# Altium PCB SPT3G_LCBoardRev2.PcbDoc (part 1 of 3)
Units mil, origin at the board's own origin, x right, y up, seen from the top; angles counter-clockwise.
Board outline 7216.28 x 1969 mil, 6 copper layers (Top Layer, Signal Layer 1, Internal Plane 1, Internal Plane 2, Signal Layer 2, Bottom Layer), stack 61.6 mil thick; 29 components, 149 nets, 695 pads, 136 vias.
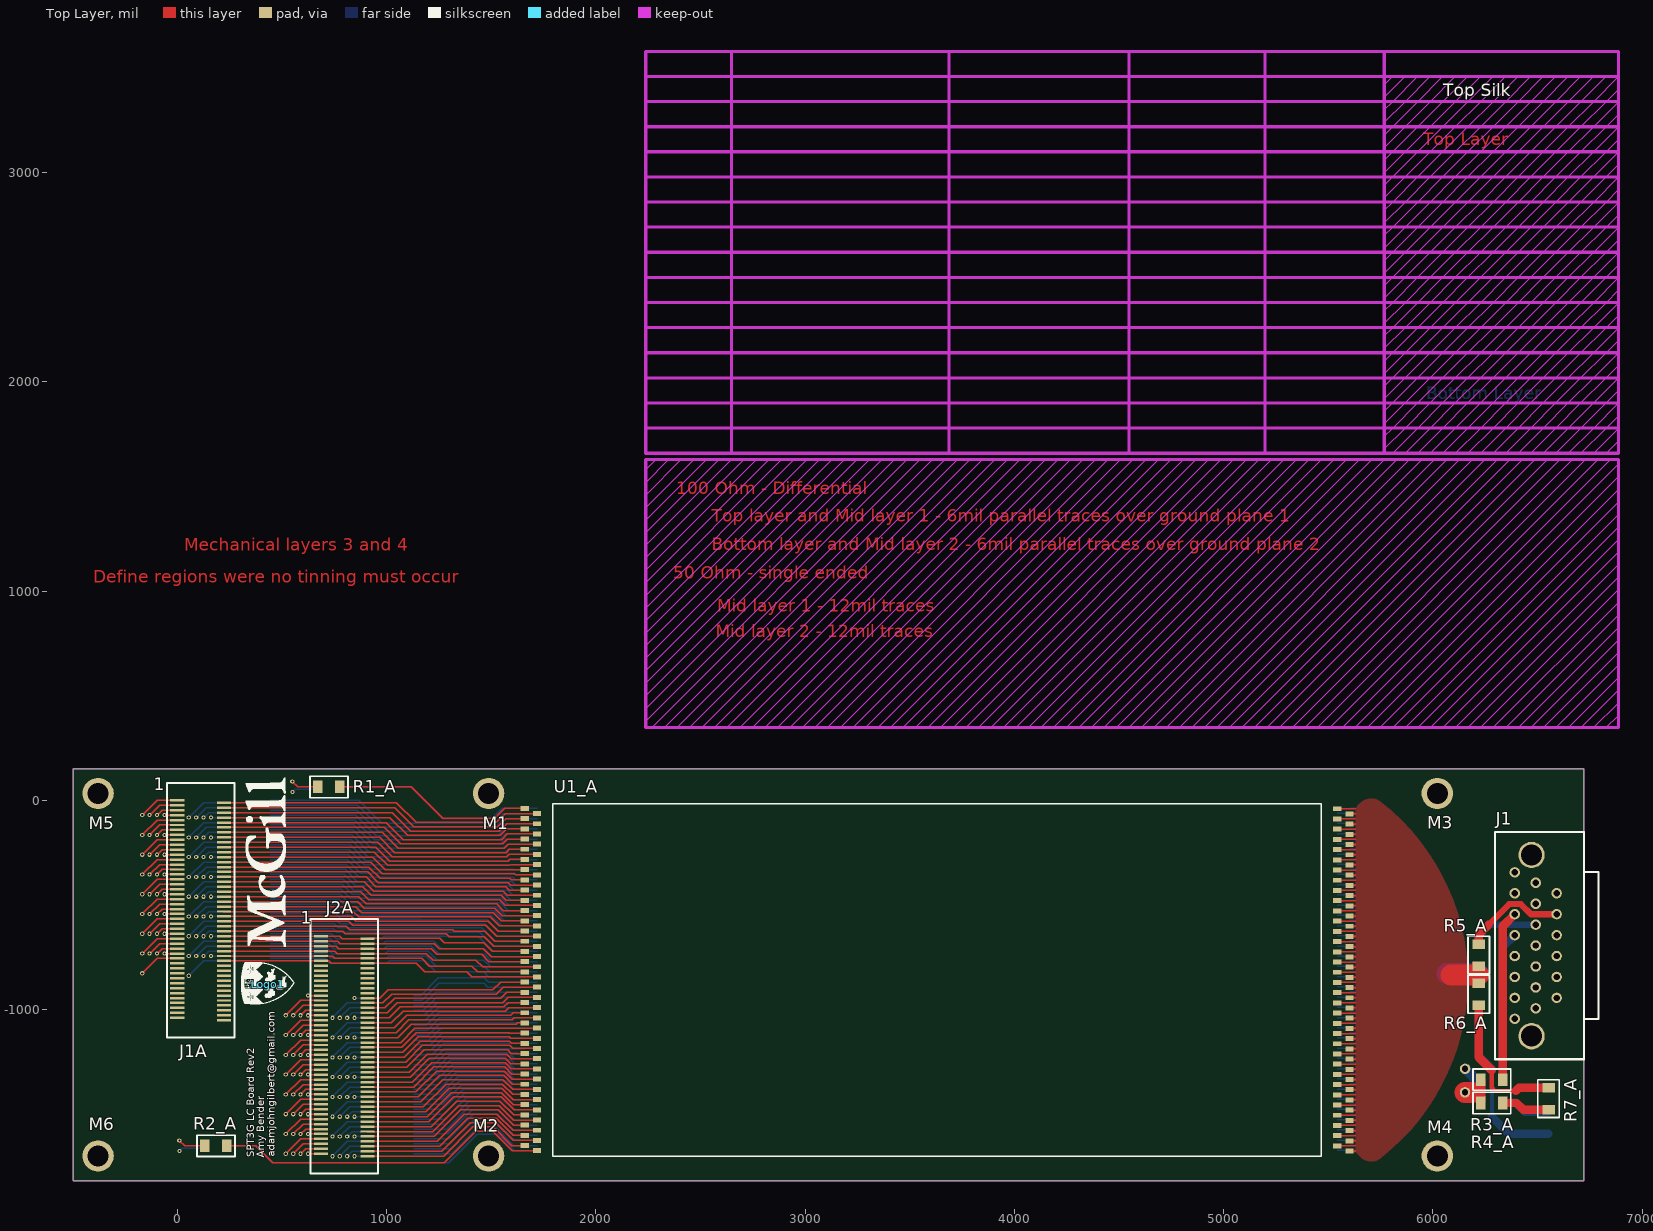
[diagram p0: Top Layer view]
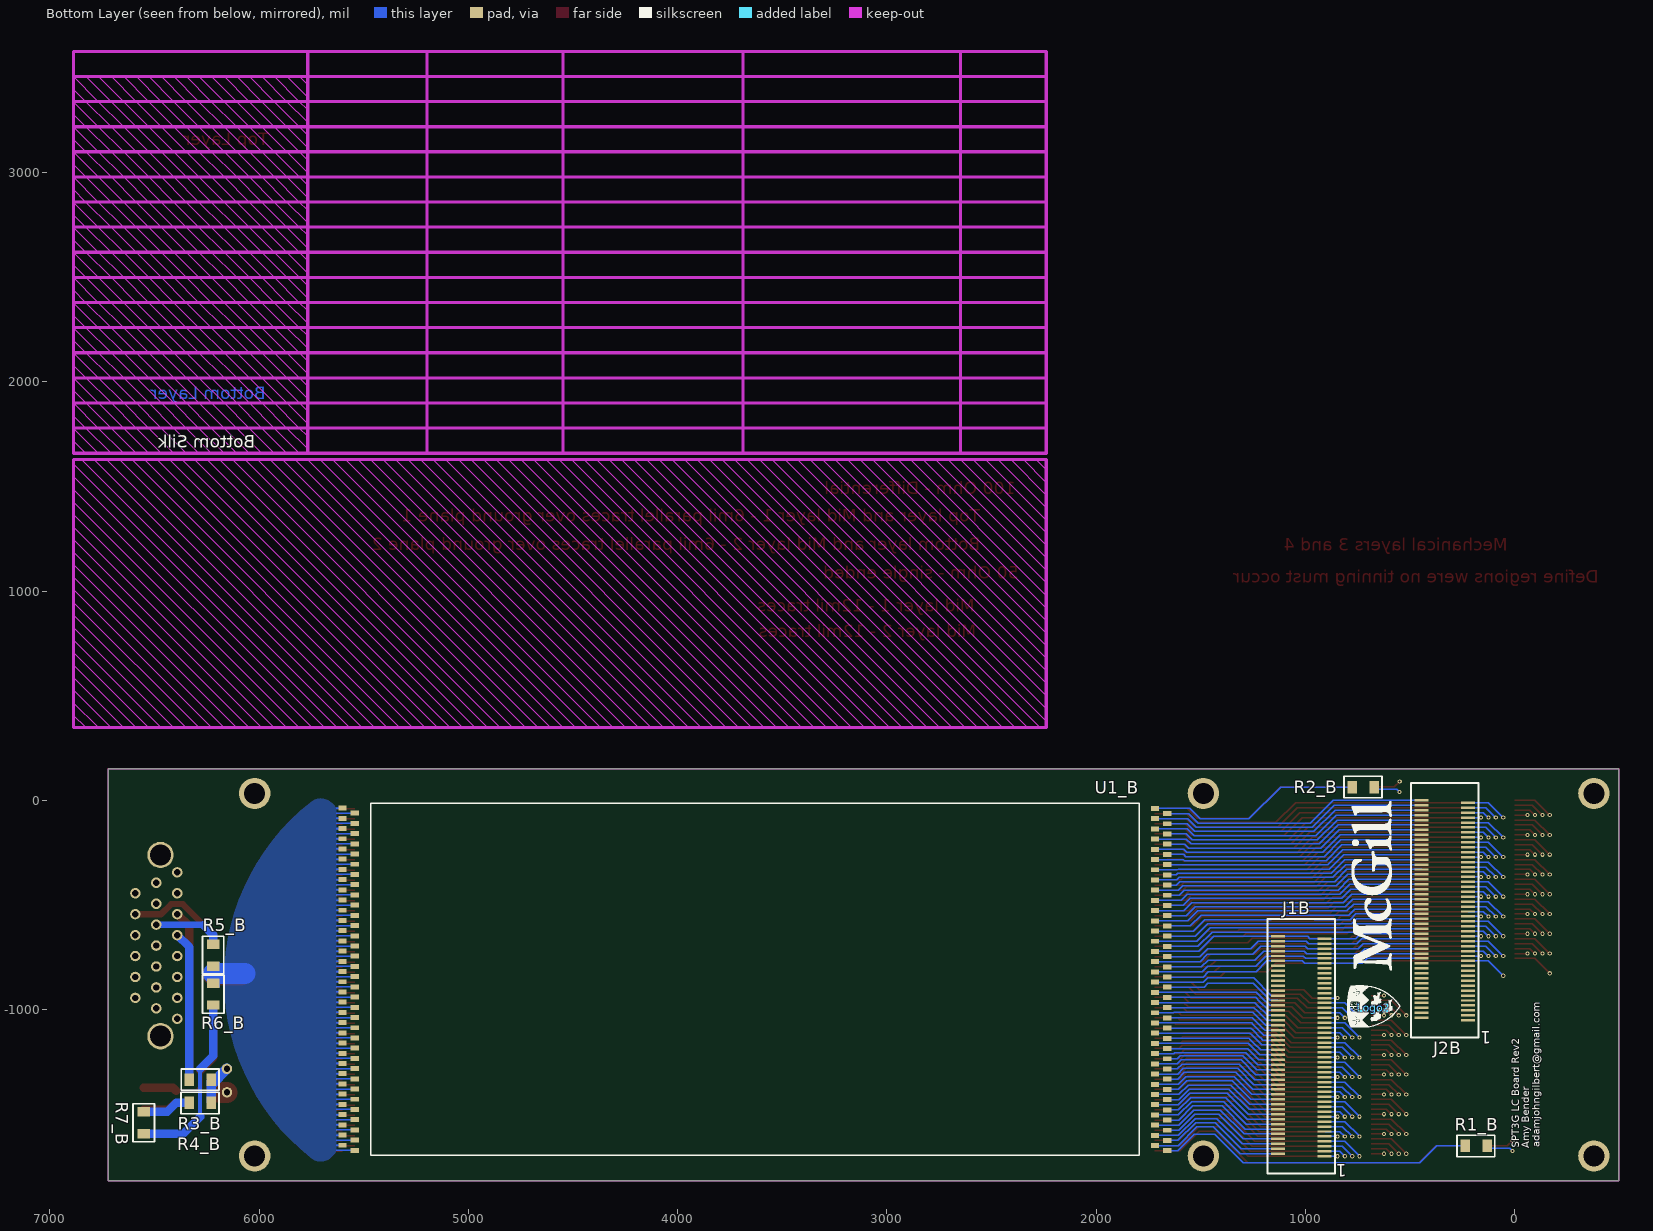
[diagram p1: Bottom Layer view, seen from below]
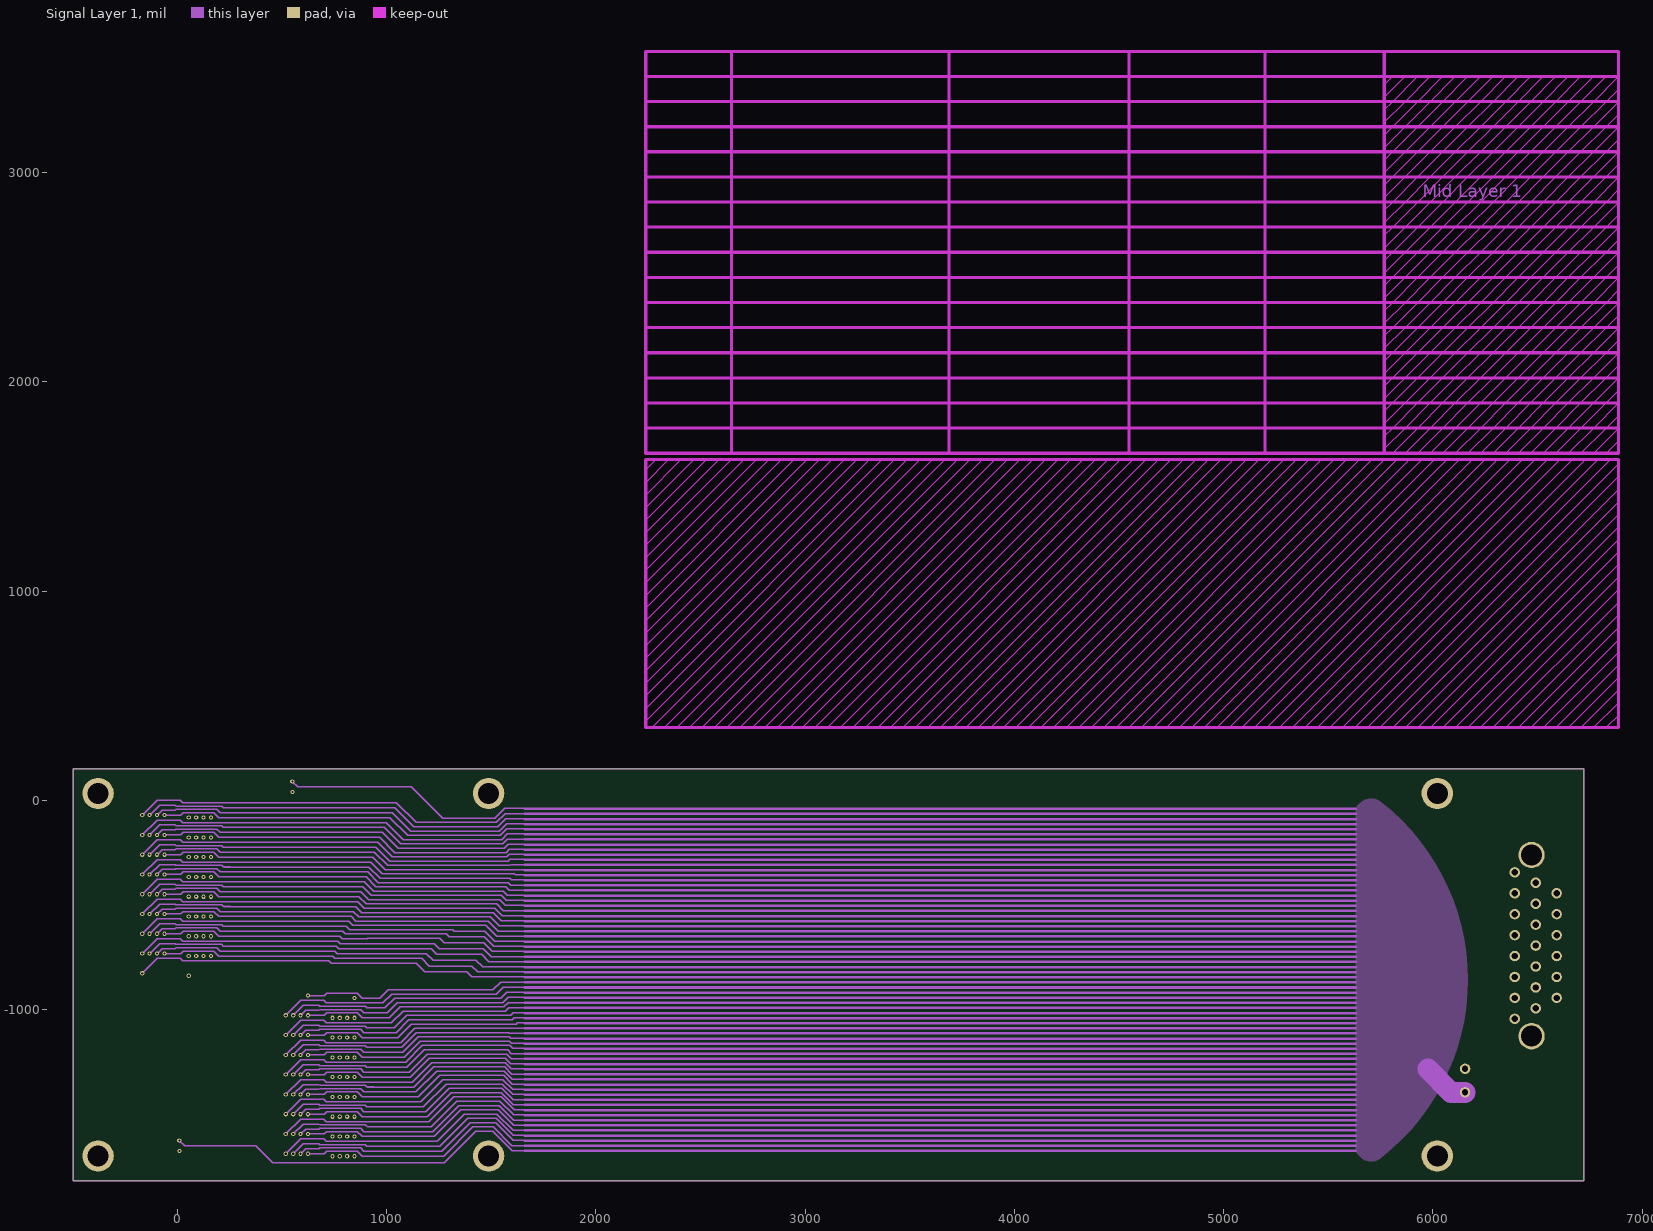
[diagram p2: Signal Layer 1]
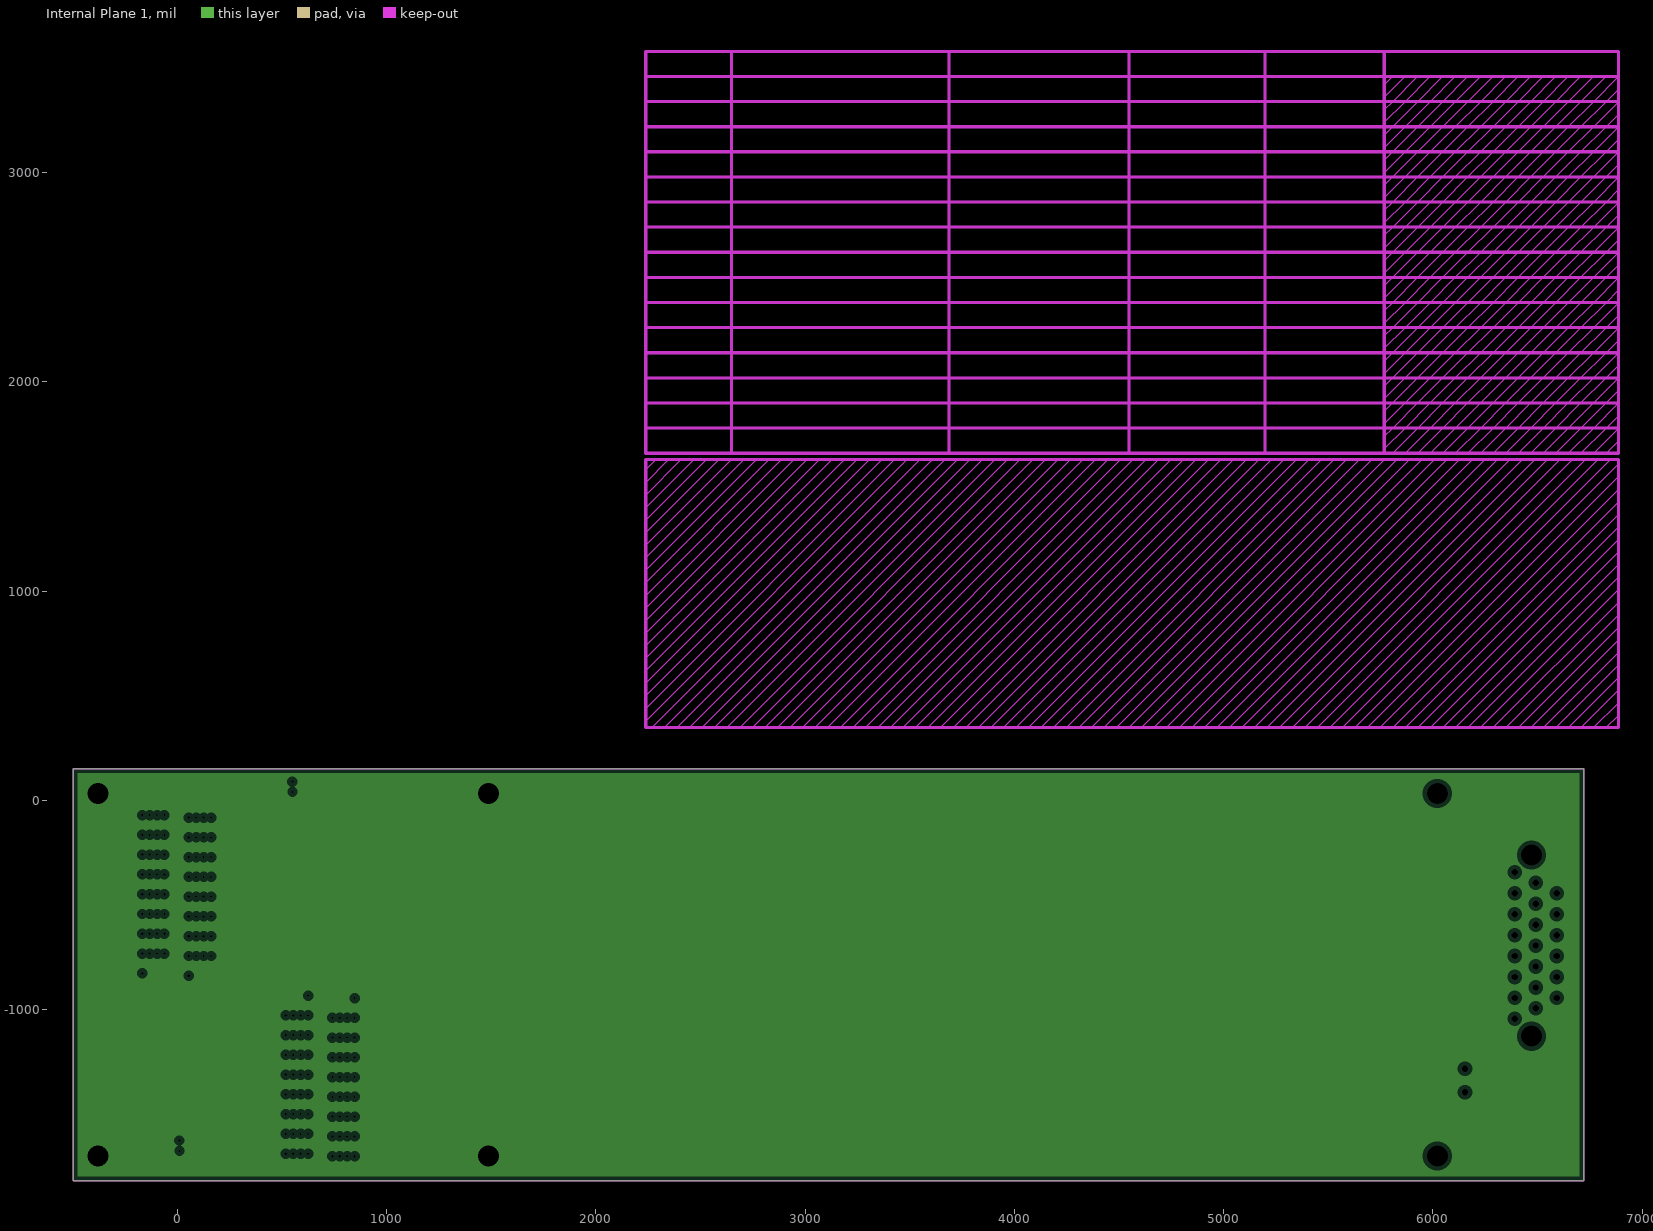
[diagram p3: Internal Plane 1, clearances drawn from the general rule]
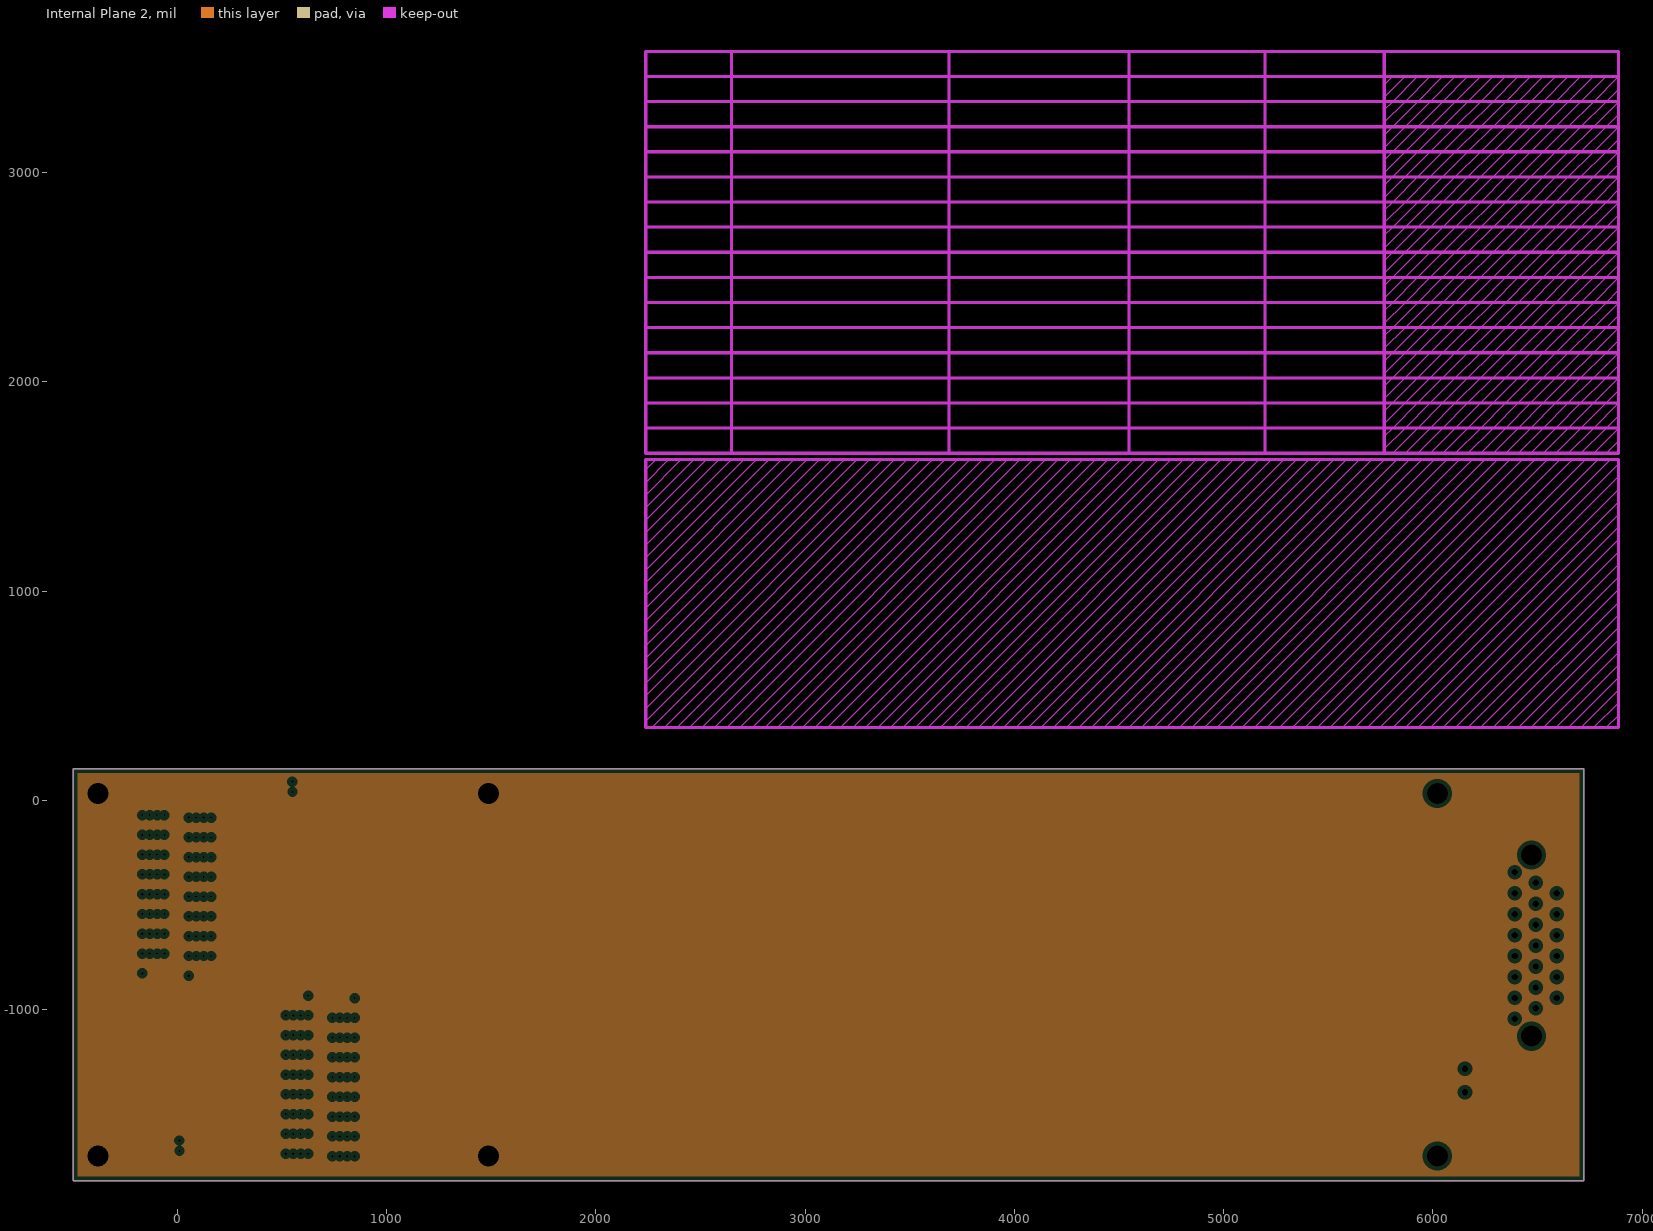
[diagram p4: Internal Plane 2, clearances drawn from the general rule]
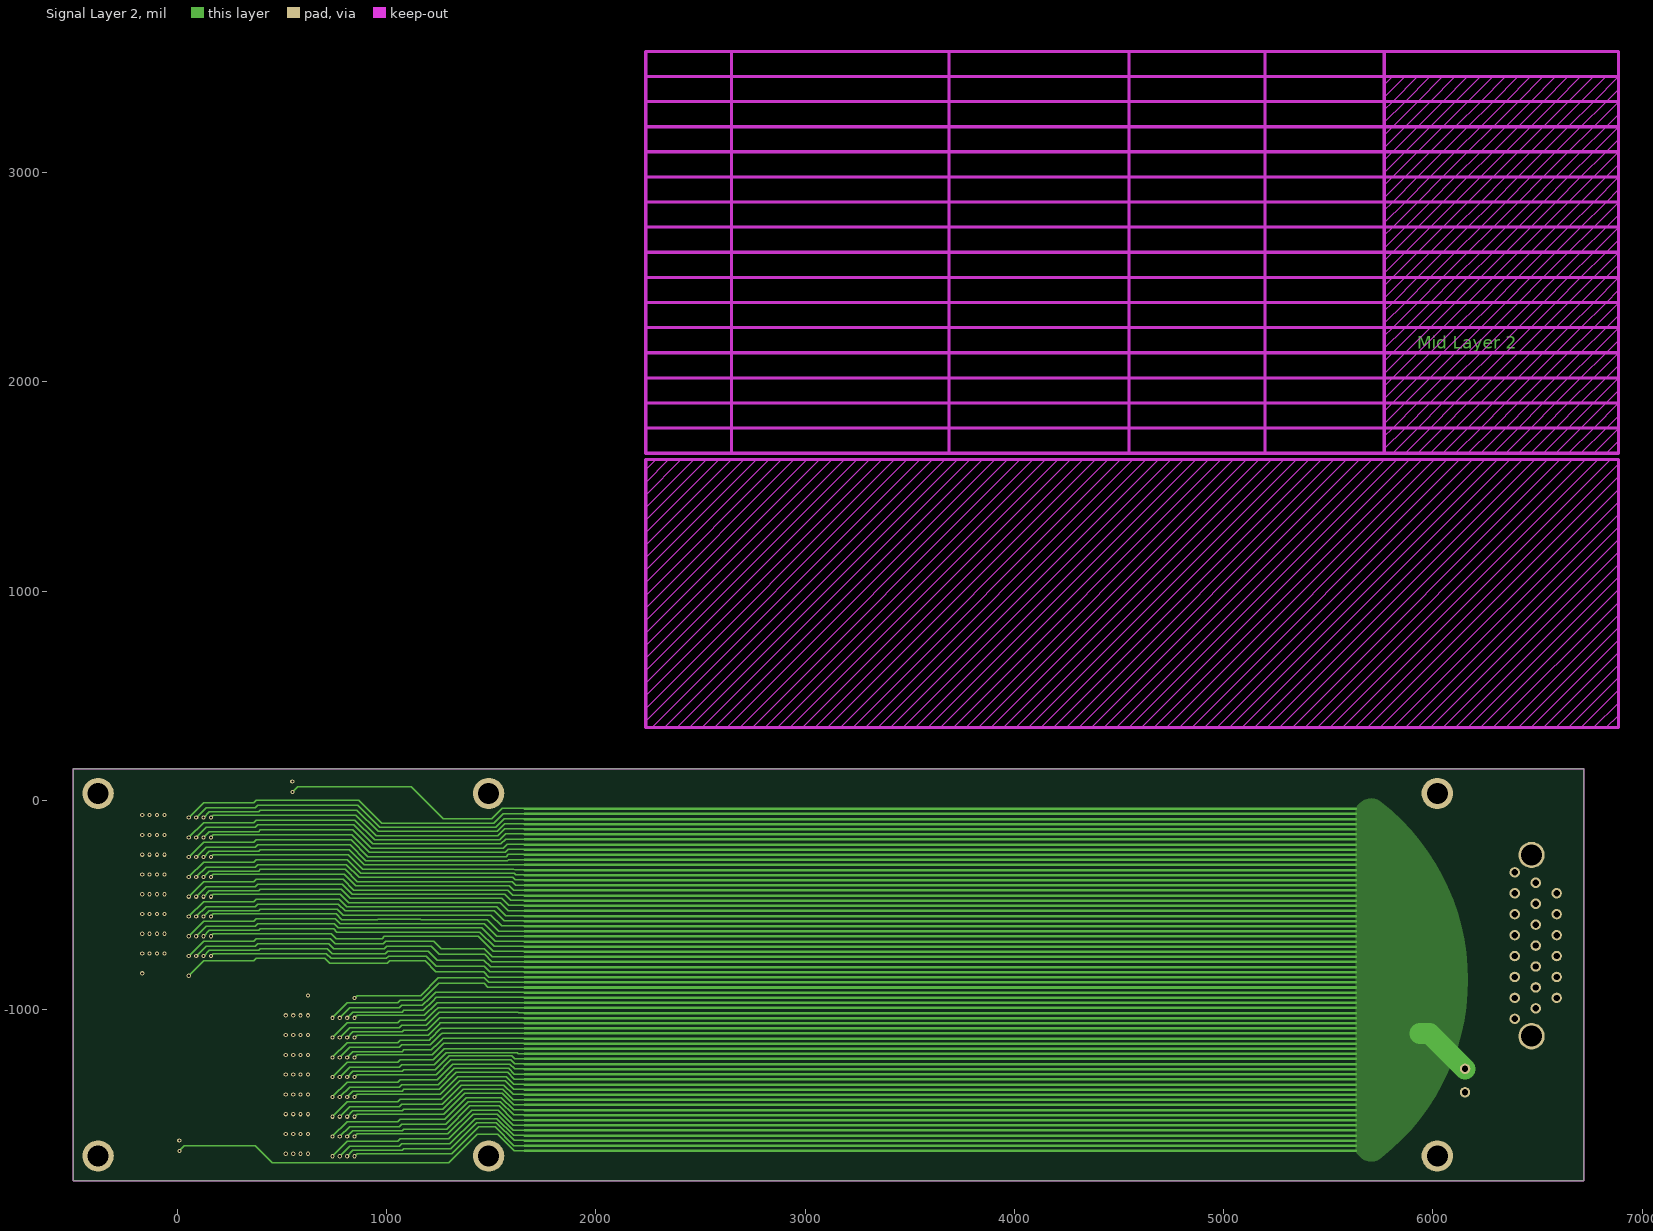
[diagram p5: Signal Layer 2]

## Layer stack, top to bottom
Top Solder: solder mask 0.4, Solder Resist, Dk 3.5
Top Layer: signal copper 1.4
Dielectric 1: core 4, FR-4, Dk 4.2
Signal Layer 1: signal copper 0.7
Dielectric 3: prepreg 9, Dk 4.2
Internal Plane 1: plane copper 0.7, net GND
Dielectric 4: core 30, Dk 4.2
Internal Plane 2: plane copper 0.7, net GND
Dielectric 5: prepreg 9, Dk 4.2
Signal Layer 2: signal copper 0.7
Dielectric 2: core 4, Dk 4.2
Bottom Layer: signal copper 1.4
Bottom Solder: solder mask 0.4, Solder Resist, Dk 3.5

## Board outline
-496.38,-1818.5 6719.9,-1818.5 6719.9,150.5 -496.38,150.5

## Design rules (kind name [scope] priority, off if disabled: settings)
Clearance [All] p1: gap=6
ComponentClearance [All] p1 off: gap=10 collisioncheckmode=3 verticalgap=10 showdistances=FALSE
HoleSize [All] p1: absolutevalues=TRUE maxlimit=200 minlimit=1 maxpercent=80.000 minpercent=20.000
MinimumSolderMaskSliver [All] p1: minsoldermaskwidth=3
PlaneClearance [All] p1: clearance=20
PlaneConnect MountingHoleRelief [(ObjectKind = 'Pad') And (Layer = 'MultiLayer') And (AsMils(HoleDiameter) = 120)] p1: planeconnectstyle=Direct reliefexpansion=20 reliefentries=4 reliefconductorwidth=30 reliefairgap=10
PlaneConnect [All] p2: planeconnectstyle=Relief reliefexpansion=20 reliefentries=4 reliefconductorwidth=10 reliefairgap=10
PolygonConnect [All] p1: connectstyle=Relief reliefconductorwidth=10 reliefentries=4 polygonreliefangle="90 Angle" airgapwidth=10
RoutingVias [All] p1: holewidth=28 width=50 viastyle="Through Hole" minholewidth=28 minwidth=50 maxholewidth=28 maxwidth=50
SilkToBoardRegionClearance [All] p1 off:
SilkToSilkClearance [All] p1: silktosilkclearance=0
SilkToSolderMaskClearance [IsPad] p1: minsilkscreentomaskgap=3 clearancetoexposedcopper=TRUE
SolderMaskExpansion [All] p1: expansion=4
UnpouredPolygon [All] p1: allowunpoured=FALSE
Width [All] p1: maxlimit=100 minlimit=3 preferedwidth=6.01 midlayer1_prefwidth=6 midlayer2_prefwidth=6 minimp=50.000000 maximp=50.000000 favimp=50.000000
21 further rules are at their usual default settings.

## Classes and differential pairs
component class TopLevelSchem: J1 Logo1 Logo2 M1 M2 M5 M6
channel class LCs: A B
component class S2: J1B J2B
component class S1: J1A J2A
component class B: R1_B R2_B R3_B R4_B R5_B R6_B R7_B U1_B
component class A: R1_A R2_A R3_A R4_A R5_A R6_A R7_A U1_A

## Components (designator, comment, footprint, x,y, rotation, side; value= is the part's Value field where it differs from the comment)
J1 "Glenair MWDM2L-21SCBRP-.110" MWDM2L-21SCBRP-.110 6491.24,-394.27 r270 top
J1A "ZIF Connector FH16-90S-0.3SHW(05)" LCBOARD_ZIFCON#1 33.46,0 r270 top
J1B "ZIF Connector FH16-90S-0.3SHW(05)" LCBOARD_ZIFCON#2 941.89,-1700.79 r90 bottom
J2A "ZIF Connector FH16-90S-0.3SHW(05)" LCBOARD_ZIFCON#1 719.45,-649.61 r270 top
J2B "ZIF Connector FH16-90S-0.3SHW(05)" LCBOARD_ZIFCON#2 255.91,-1051.18 r90 bottom
Logo1 "McGillLogo1" McGillLogo1 432.2,-879.04 r90 top
Logo2 "McGillLogo1" McGillLogo1 674.38,-990.59 r90 bottom
M1 "MountingHole" MOUNTINGHOLE#1 1487.9,32.5 r0 top
M2 "MountingHole" MOUNTINGHOLE#1 1487.9,-1699.5 r0 top
M3 "MountingHole" MOUNTINGHOLE#2 6020.9,32.89 r0 top
M4 "MountingHole" MOUNTINGHOLE#2 6020.9,-1699.11 r0 top
M5 "MountingHole" MOUNTINGHOLE#3 -348.71,-58.7 r0 top
M6 "MountingHole" MOUNTINGHOLE#4 -342.9,-1631.21 r0 top
R1_A "Res1206" 1206 672,64 r0 top (schematic designator R1)
R1_B "Res1206" 1206 132.39,-1651.5 r0 bottom (schematic designator R1)
R2_A "Res1206" 1206 131.94,-1651.23 r0 top (schematic designator R2)
R2_B "Res1206" 1206 672.1,63.2 r0 bottom (schematic designator R2)
R3_A "Res1206" 1206 6228.69,-1335.09 r0 top (schematic designator R3)
R3_B "Res1206" 1206 6228.48,-1334.85 r0 bottom (schematic designator R3)
R4_A "Res1206" 1206 6228.75,-1446.59 r0 top (schematic designator R4)
R4_B "Res1206" 1206 6228.97,-1445.95 r0 bottom (schematic designator R4)
R5_A "Res1206" 1206 6219.05,-792.87 r90 top (schematic designator R5)
R5_B "Res1206" 1206 6219.44,-792.88 r90 bottom (schematic designator R5)
R6_A "Res1206" 1206 6219.05,-874.02 r270 top (schematic designator R6)
R6_B "Res1206" 1206 6219,-873.35 r270 bottom (schematic designator R6)
R7_A "Res1206" 1206 6552.49,-1478.67 r90 top (schematic designator R7)
R7_B "Res1206" 1206 6551.1,-1487.69 r270 bottom (schematic designator R7)
U1_A "LC68_wafer" 68XLC 1798.14,-19.53 r0 top (schematic designator U1)
U1_B "LC68_wafer" 68XLC 1798.24,-1693.65 r0 bottom (schematic designator U1)

## Footprints (in the part's own frame and the unit in brackets; to place one, negate y for a bottom-side part, rotate by r counter-clockwise, add the part's x,y. Pads: shape width x height; smd on the part's side, far side on the other; paste and mask are expansions set on the pad)
68XLC [mm]
  rect 1x0.6 smd: 1(-3.5,-0.49) 2(-2,-1.11) 3(-3.5,-1.73) 4(-2,-2.35) 5(-3.5,-2.97) 6(-2,-3.59) 7(-3.5,-4.21) 8(-2,-4.83) 9(-3.5,-5.45) 10(-2,-6.07) 11(-3.5,-6.69) 12(-2,-7.31) 13(-3.5,-7.93) 14(-2,-8.55) 15(-3.5,-9.17) 16(-2,-9.79) 17(-3.5,-10.41) 18(-2,-11.03) 19(-3.5,-11.65) 20(-2,-12.27) 21(-3.5,-12.89) 22(-2,-13.51) 23(-3.5,-14.13) 24(-2,-14.75) 25(-3.5,-15.37) 26(-2,-15.99) 27(-3.5,-16.61) 28(-2,-17.23) 29(-3.5,-17.85) 30(-2,-18.47) 31(-3.5,-19.09) 32(-2,-19.71) 33(-3.5,-20.33) 34(-2,-20.95) 35(-3.5,-21.57) 36(-2,-22.19) 37(-3.5,-22.81) 38(-2,-23.43) 39(-3.5,-24.05) 40(-2,-24.67) 41(-3.5,-25.29) 42(-2,-25.91) 43(-3.5,-26.53) 44(-2,-27.15) 45(-3.5,-27.77) 46(-2,-28.39) 47(-3.5,-29.01) 48(-2,-29.63) 49(-3.5,-30.25) 50(-2,-30.87) 51(-3.5,-31.49) 52(-2,-32.11) 53(-3.5,-32.73) 54(-2,-33.35) 55(-3.5,-33.97) 56(-2,-34.59) 57(-3.5,-35.21) 58(-2,-35.83) 59(-3.5,-36.45) 60(-2,-37.07) 61(-3.5,-37.69) 62(-2,-38.31) 63(-3.5,-38.93) 64(-2,-39.55) 65(-3.5,-40.17) 66(-2,-40.79) 67(-3.5,-41.41) 68(-2,-42.03) 69(96.61,-42.073) 70(95.11,-41.453) 71(96.61,-40.832) 72(95.11,-40.213) 73(96.61,-39.593) 74(95.11,-38.973) 75(96.61,-38.352) 76(95.11,-37.733) 77(96.61,-37.113) 78(95.11,-36.493) 79(96.61,-35.873) 80(95.11,-35.253) 81(96.61,-34.633) 82(95.11,-34.013) 83(96.61,-33.393) 84(95.11,-32.773) 85(96.61,-32.153) 86(95.11,-31.533) 87(96.61,-30.913) 88(95.11,-30.293) 89(96.61,-29.673) 90(95.11,-29.053) 91(96.61,-28.433) 92(95.11,-27.813) 93(96.61,-27.193) 94(95.11,-26.573) 95(96.61,-25.953) 96(95.11,-25.333) 97(96.61,-24.713) 98(95.11,-24.093) 99(96.61,-23.473) 100(95.11,-22.853) 101(96.61,-22.232) 102(95.11,-21.612) 103(96.61,-20.993) 104(95.11,-20.373) 105(96.61,-19.752) 106(95.11,-19.132) 107(96.61,-18.513) 108(95.11,-17.893) 109(96.61,-17.272) 110(95.11,-16.652) 111(96.61,-16.033) 112(95.11,-15.413) 113(96.61,-14.792) 114(95.11,-14.172) 115(96.61,-13.553) 116(95.11,-12.933) 117(96.61,-12.313) 118(95.11,-11.693) 119(96.61,-11.073) 120(95.11,-10.453) 121(96.61,-9.833) 122(95.11,-9.213) 123(96.61,-8.592) 124(95.11,-7.973) 125(96.61,-7.352) 126(95.11,-6.733) 127(96.61,-6.112) 128(95.11,-5.493) 129(96.61,-4.872) 130(95.11,-4.253) 131(96.61,-3.632) 132(95.11,-3.013) 133(96.61,-2.392) 134(95.11,-1.773) 135(96.61,-1.152) 136(95.11,-0.533)
  silkscreen extent -0.08,-42.68 93.19,0.08, body extent 0,-42.6 93.11,0, height 2
1206 [mil]
  rect 45x60 smd: 1(0,0) 2(105,0)
  silkscreen extent -37,-51 144,51
LCBOARD_ZIFCON#1 [mm]
  rect 0.3x1.7 smd: 1(0,-0.85) 2(0.3,4.8) 3(0.6,-0.85) 4(0.9,4.8) 5(1.2,-0.85) 6(1.5,4.8) 7(1.8,-0.85) 8(2.1,4.8) 9(2.4,-0.85) 10(2.7,4.8) 11(3,-0.85) 12(3.3,4.8) 13(3.6,-0.85) 14(3.9,4.8) 15(4.2,-0.85) 16(4.5,4.8) 17(4.8,-0.85) 18(5.1,4.8) 19(5.4,-0.85) 20(5.7,4.8) 21(6,-0.85) 22(6.3,4.8) 23(6.6,-0.85) 24(6.9,4.8) 25(7.2,-0.85) 26(7.5,4.8) 27(7.8,-0.85) 28(8.1,4.8) 29(8.4,-0.85) 30(8.7,4.8) 31(9,-0.85) 32(9.3,4.8) 33(9.6,-0.85) 34(9.9,4.8) 35(10.2,-0.85) 36(10.5,4.8) 37(10.8,-0.85) 38(11.1,4.8) 39(11.4,-0.85) 40(11.7,4.8) 41(12,-0.85) 42(12.3,4.8) 43(12.6,-0.85) 44(12.9,4.8) 45(13.2,-0.85) 46(13.5,4.8) 47(13.8,-0.85) 48(14.1,4.8) 49(14.4,-0.85) 50(14.7,4.8) 51(15,-0.85) 52(15.3,4.8) 53(15.6,-0.85) 54(15.9,4.8) 55(16.2,-0.85) 56(16.5,4.8) 57(16.8,-0.85) 58(17.1,4.8) 59(17.4,-0.85) 60(17.7,4.8) 61(18,-0.85) 62(18.3,4.8) 63(18.6,-0.85) 64(18.9,4.8) 65(19.2,-0.85) 66(19.5,4.8) 67(19.8,-0.85) 68(20.1,4.8) 69(20.4,-0.85) 70(20.7,4.8) 71(21,-0.85) 72(21.3,4.8) 73(21.6,-0.85) 74(21.9,4.8) 75(22.2,-0.85) 76(22.5,4.8) 77(22.8,-0.85) 78(23.1,4.8) 79(23.4,-0.85) 80(23.7,4.8) 81(24,-0.85) 82(24.3,4.8) 83(24.6,-0.85) 84(24.9,4.8) 85(25.2,-0.85) 86(25.5,4.8) 87(25.8,-0.85) 88(26.1,4.8) 89(26.4,-0.85) 90(26.7,4.8)
  round 0.5 on Top Overlay: 2(-2.3,-2.4)
  silkscreen extent -2.1,-2.1 28.8,6.1, body extent -2.1,-1.73 28.8,5.68, height 6.5
LCBOARD_ZIFCON#2 [mm]
  rect 0.3x1.7 smd: 1(0,-0.85) 2(0.3,4.8) 3(0.6,-0.85) 4(0.9,4.8) 5(1.2,-0.85) 6(1.5,4.8) 7(1.8,-0.85) 8(2.1,4.8) 9(2.4,-0.85) 10(2.7,4.8) 11(3,-0.85) 12(3.3,4.8) 13(3.6,-0.85) 14(3.9,4.8) 15(4.2,-0.85) 16(4.5,4.8) 17(4.8,-0.85) 18(5.1,4.8) 19(5.4,-0.85) 20(5.7,4.8) 21(6,-0.85) 22(6.3,4.8) 23(6.6,-0.85) 24(6.9,4.8) 25(7.2,-0.85) 26(7.5,4.8) 27(7.8,-0.85) 28(8.1,4.8) 29(8.4,-0.85) 30(8.7,4.8) 31(9,-0.85) 32(9.3,4.8) 33(9.6,-0.85) 34(9.9,4.8) 35(10.2,-0.85) 36(10.5,4.8) 37(10.8,-0.85) 38(11.1,4.8) 39(11.4,-0.85) 40(11.7,4.8) 41(12,-0.85) 42(12.3,4.8) 43(12.6,-0.85) 44(12.9,4.8) 45(13.2,-0.85) 46(13.5,4.8) 47(13.8,-0.85) 48(14.1,4.8) 49(14.4,-0.85) 50(14.7,4.8) 51(15,-0.85) 52(15.3,4.8) 53(15.6,-0.85) 54(15.9,4.8) 55(16.2,-0.85) 56(16.5,4.8) 57(16.8,-0.85) 58(17.1,4.8) 59(17.4,-0.85) 60(17.7,4.8) 61(18,-0.85) 62(18.3,4.8) 63(18.6,-0.85) 64(18.9,4.8) 65(19.2,-0.85) 66(19.5,4.8) 67(19.8,-0.85) 68(20.1,4.8) 69(20.4,-0.85) 70(20.7,4.8) 71(21,-0.85) 72(21.3,4.8) 73(21.6,-0.85) 74(21.9,4.8) 75(22.2,-0.85) 76(22.5,4.8) 77(22.8,-0.85) 78(23.1,4.8) 79(23.4,-0.85) 80(23.7,4.8) 81(24,-0.85) 82(24.3,4.8) 83(24.6,-0.85) 84(24.9,4.8) 85(25.2,-0.85) 86(25.5,4.8) 87(25.8,-0.85) 88(26.1,4.8) 89(26.4,-0.85) 90(26.7,4.8)
  round 0.5 on Bottom Overlay: 2(-2.3,-2.4)
  silkscreen extent -2.1,-2.1 28.8,6.1, body extent -2.1,-1.73 28.8,5.68, height 6.5
McGillLogo1 [mil] "McGillLogo"
  silkscreen extent -95,-127 986,124
MOUNTINGHOLE#1 [mil] "Mounting Hole"
  round 150 hole 100: 0(0,0)
MOUNTINGHOLE#2 [mil] "Mounting Hole"
  round 150 hole 100: 0(0,-0.39)
MOUNTINGHOLE#3 [mil] "Mounting Hole"
  round 150 hole 100: 0(-29.55,91.19)
MOUNTINGHOLE#4 [mil] "Mounting Hole"
  round 150 hole 100: 0(-35.37,-68.28)
MWDM2L-21SCBRP-.110 [mil] "MWDM2L-21SCBRP-.110"
  round 50 hole 30: 1(600,0) 2(550,100) 3(450,100) 4(400,0) 5(350,100) 6(250,100) 7(200,0) 8(150,100) 9(100,0) 10(50,100) 11(0,0) 12(650,-100) 13(550,-100) 14(500,0) 15(450,-100) 16(350,-100) 17(300,0) 18(250,-100) 19(150,-100) 20(50,-100) 21(-50,-100)
  round 125.98 hole 100: MH1(-133,-20) MH2(733,-20)
  silkscreen extent -243,-195 843,300, body extent -242,-176 843,422, height 310

## Part data
J1: library part MWDM2L-21SCBRP-.110, "Glenair 21pin RA Micro Dsub socket - MWDM2L-21SCBRP-.110"
J1A J1B J2A J2B: library part LCboard_FH16-90S-0.3SHW(05)
Logo1 Logo2: library part Logo
R1_A R1_B R2_A R2_B R3_A R3_B R4_A R4_B R5_A R5_B R6_A R6_B R7_A R7_B: "Resistor"
U1_A U1_B: library part LC68Wafer, "Gold bonded integrated LC"

## Free pads (board coordinates)
  round 50 hole 30: 0(6153.25,-1395.47) 0(6153.59,-1283.27)

## Via types
v1: diameter 20, hole 10, Top Layer to Bottom Layer, 136 vias

## Nets (pads, with @x,y where several pads share a name; then routed paths per layer and width w, separated by ;. In a path a pad name is that pad's centre, name@x,y a point inside that pad or via, vN(x,y) a via of type N, cw(c..) or ccw(c..) an arc to the next point about the centre after c; other vN are vias at no path point)
BOLORETURN_A: J1A.1 J1A.3 J1A.5 J1A.7 J1A.9 J1A.11 J1A.13 J1A.15 J1A.17 J1A.19 J1A.21 J1A.23 J1A.25 J1A.27 J1A.29 J1A.31 J1A.33 J1A.35 J1A.37 J1A.39 J1A.41 J1A.43 J1A.45 J1A.47 J1A.49 J1A.51 J1A.53 J1A.55 J1A.57 J1A.59 J1A.61 J1A.63 J1A.65 J2A.25 J2A.27 J2A.29 J2A.31 J2A.33 J2A.35 J2A.37 J2A.39 J2A.41 J2A.43 J2A.45 J2A.47 J2A.49 J2A.51 J2A.53 J2A.55 J2A.57 J2A.59 J2A.61 J2A.63 J2A.65 J2A.67 J2A.69 J2A.71 J2A.73 J2A.75 J2A.77 J2A.79 J2A.81 J2A.83 J2A.85 J2A.87 J2A.89 pad.0@6153.25,-1395.47 R1_A.1 R2_A.1 R3_A.1 R4_A.1 | length 384981.7
  Top Layer w6: v1(-167.32,-826.77) -96.46,-755.91 J1A.65@0,-755.91 ; v1(-167.32,-732.28) -96.46,-661.42 J1A.57@0,-661.42 ; v1(-167.32,-637.8) -96.46,-566.93 J1A.49@0,-566.93 ; v1(-167.32,-543.31) -96.46,-472.44 J1A.41@0,-472.44 ; v1(-167.32,-448.82) -96.46,-377.95 J1A.33@0,-377.95 ; v1(-167.32,-354.33) -96.46,-283.46 J1A.25@0,-283.46 ; v1(-167.32,-259.84) -96.46,-188.98 J1A.17@0,-188.98 ; v1(-167.32,-165.35) -96.46,-94.49 J1A.9@0,-94.49 ; v1(-167.32,-70.87) -96.46,0 J1A.1@0,0 ; v1(-131.89,-732.28) -84.65,-685.04 J1A.59@0,-685.04 ; v1(-131.89,-637.8) -84.65,-590.55 J1A.51@0,-590.55 ; v1(-131.89,-543.31) -84.65,-496.06 J1A.43@0,-496.06 ; v1(-131.89,-448.82) -84.65,-401.57 J1A.35@0,-401.57 ; v1(-131.89,-354.33) -84.65,-307.09 J1A.27@0,-307.09 ; v1(-131.89,-259.84) -84.65,-212.6 J1A.19@0,-212.6 ; v1(-131.89,-165.35) -84.65,-118.11 J1A.11@0,-118.11 ; v1(-131.89,-70.87) -84.65,-23.62 J1A.3@0,-23.62 ; v1(-96.46,-732.28) -72.83,-708.66 J1A.61@0,-708.66 ; v1(-96.46,-637.8) -72.83,-614.17 J1A.53@0,-614.17 ; v1(-96.46,-543.31) -72.83,-519.69 J1A.45@0,-519.68 ; v1(-96.46,-448.82) -72.83,-425.2 J1A.37@0,-425.2 ; v1(-96.46,-354.33) -72.83,-330.71 J1A.29@0,-330.71 ; v1(-96.46,-259.84) -72.83,-236.22 J1A.21@0,-236.22 ; v1(-96.46,-165.35) -72.83,-141.73 J1A.13@0,-141.73 ; v1(-96.46,-70.87) -72.83,-47.24 J1A.5@0,-47.24 ; v1(-61.02,-732.28) J1A.63@0,-732.28 ; v1(-61.02,-637.8) J1A.55@0,-637.8 ; v1(-61.02,-543.31) J1A.47@0,-543.31 ; v1(-61.02,-448.82) J1A.39@0,-448.82 ; v1(-61.02,-354.33) J1A.31@0,-354.33 ; v1(-61.02,-259.84) J1A.23@0,-259.84 ; v1(-61.02,-165.35) J1A.15@0,-165.35 ; v1(-61.02,-70.87) J1A.7@0,-70.87 ; v1(9.86,-1625.7) 35.4,-1651.23 R2_A.1@131.94,-1651.23 ; v1(518.66,-1688.98) 589.53,-1618.11 J2A.83@685.98,-1618.11 ; v1(518.66,-1594.49) 589.53,-1523.62 J2A.75@685.98,-1523.62 ; v1(518.66,-1500) 589.53,-1429.13 J2A.67@685.98,-1429.13 ; v1(518.66,-1405.51) 589.53,-1334.65 J2A.59@685.98,-1334.65 ; v1(518.66,-1311.02) 589.53,-1240.16 J2A.51@685.98,-1240.16 ; v1(518.66,-1216.54) 589.53,-1145.67 J2A.43@685.98,-1145.67 ; v1(518.66,-1122.05) 589.53,-1051.18 J2A.35@685.98,-1051.18 ; v1(518.66,-1027.56) 589.53,-956.69 J2A.27@685.98,-956.69 ; v1(549.92,89.53) 575.45,64 R1_A.1@672,64 ; v1(554.09,-1688.98) 601.34,-1641.73 J2A.85@685.98,-1641.73 ; v1(554.09,-1594.49) 601.34,-1547.24 J2A.77@685.98,-1547.24 ; v1(554.09,-1500) 601.34,-1452.76 J2A.69@685.98,-1452.76 ; v1(554.09,-1405.51) 601.34,-1358.27 J2A.61@685.98,-1358.27 ; v1(554.09,-1311.02) 601.34,-1263.78 J2A.53@685.98,-1263.78 ; v1(554.09,-1216.54) 601.34,-1169.29 J2A.45@685.98,-1169.29 ; v1(554.09,-1122.05) 601.34,-1074.8 J2A.37@685.98,-1074.8 ; v1(554.09,-1027.56) 601.34,-980.31 J2A.29@685.98,-980.31 ; v1(589.53,-1688.98) 613.15,-1665.35 J2A.87@685.98,-1665.35 ; v1(589.53,-1594.49) 613.15,-1570.87 J2A.79@685.98,-1570.87 ; v1(589.53,-1500) 613.15,-1476.38 J2A.71@685.98,-1476.38 ; v1(589.53,-1405.51) 613.15,-1381.89 J2A.63@685.98,-1381.89 ; v1(589.53,-1311.02) 613.15,-1287.4 J2A.55@685.98,-1287.4 ; v1(589.53,-1216.54) 613.15,-1192.91 J2A.47@685.98,-1192.91 ; v1(589.53,-1122.05) 613.15,-1098.43 J2A.39@685.98,-1098.43 ; v1(589.53,-1027.56) 613.15,-1003.94 J2A.31@685.98,-1003.94 ; v1(624.96,-1688.98) J2A.89@685.98,-1688.98 ; v1(624.96,-1594.49) J2A.81@685.98,-1594.49 ; v1(624.96,-1500) J2A.73@685.98,-1500 ; v1(624.96,-1405.51) J2A.65@685.98,-1405.51 ; v1(624.96,-1311.02) J2A.57@685.98,-1311.02 ; v1(624.96,-1216.54) J2A.49@685.98,-1216.54 ; v1(624.96,-1122.05) J2A.41@685.98,-1122.05 ; v1(624.96,-1027.56) J2A.33@685.98,-1027.56 ; v1(624.96,-933.07) J2A.25@685.98,-933.07 ; R4_A.1@6227.63,-1445.47 R4_A.1@6228.75,-1446.59
  Top Layer w100: pad.0@6153.25,-1395.47 6187.44,-1395.47
  Signal Layer 1 w6: v1(-167.32,-826.77) -96.46,-755.91 14.49,-755.91 26.3,-767.72 252.48,-767.72 ; v1(-167.32,-732.28) -96.46,-661.42 14.49,-661.42 26.3,-673.23 252.48,-673.23 ; v1(-167.32,-637.8) -96.46,-566.93 14.49,-566.93 26.3,-578.74 252.48,-578.74 ; v1(-167.32,-543.31) -96.46,-472.44 14.49,-472.44 26.3,-484.25 252.48,-484.25 ; v1(-167.32,-448.82) -96.46,-377.95 14.49,-377.95 26.3,-389.76 252.48,-389.76 ; v1(-167.32,-354.33) -96.46,-283.46 14.49,-283.46 26.3,-295.28 923.46,-295.28 980.17,-351.99 1462,-351.99 ; v1(-167.32,-259.84) -96.46,-188.98 14.49,-188.98 26.3,-200.79 252.48,-200.79 ; v1(-167.32,-165.35) -96.46,-94.49 14.49,-94.49 26.3,-106.3 252.48,-106.3 ; v1(-167.32,-70.87) -96.46,0 14.49,0 26.3,-11.81 1047.08,-11.81 1141.38,-106.11 1462,-106.11 ; v1(-131.89,-732.28) -84.65,-685.04 -10,-685.04 -6.06,-688.98 211.84,-688.98 219.36,-696.5 252.48,-696.5 ; v1(-131.89,-637.8) -84.65,-590.55 -10,-590.55 -6.06,-594.49 211.84,-594.49 219.36,-602.01 252.48,-602.01 ; v1(-131.89,-543.31) -84.65,-496.06 -10,-496.06 -6.06,-500 211.84,-500 219.36,-507.52 252.48,-507.52 ; v1(-131.89,-448.82) -84.65,-401.57 -10,-401.57 -6.06,-405.51 211.84,-405.51 219.36,-413.04 252.48,-413.04 ; v1(-131.89,-354.33) -84.65,-307.09 -10,-307.09 -6.06,-311.02 211.84,-311.02 219.36,-318.55 252.48,-318.55 ; v1(-131.89,-259.84) -84.65,-212.6 -10,-212.6 -6.06,-216.54 211.84,-216.54 219.36,-224.06 252.48,-224.06 ; v1(-131.89,-165.35) -84.65,-118.11 -10,-118.11 -6.06,-122.05 211.84,-122.05 219.36,-129.57 252.48,-129.57 ; v1(-131.89,-70.87) -84.65,-23.62 -10,-23.62 -6.06,-27.56 211.84,-27.56 219.36,-35.08 252.48,-35.08 ; v1(-96.46,-732.28) -72.83,-708.66 -10,-708.66 -6.06,-704.72 189.93,-704.72 205.68,-720.47 252.48,-720.47 ; v1(-96.46,-637.8) -72.83,-614.17 -10,-614.17 -6.06,-610.24 189.93,-610.24 205.68,-625.98 252.48,-625.98 ; v1(-96.46,-543.31) -72.83,-519.69 -10,-519.69 -6.06,-515.75 189.93,-515.75 205.68,-531.5 252.48,-531.5 ; v1(-96.46,-448.82) -72.83,-425.2 -10,-425.2 -6.06,-421.26 189.93,-421.26 205.68,-437.01 877.8,-437.01 915.72,-474.93 1462,-474.93 ; v1(-96.46,-354.33) -72.83,-330.71 -10,-330.71 -6.06,-326.77 189.93,-326.77 205.68,-342.52 910.09,-342.52 960.54,-392.97 1462,-392.97 ; v1(-96.46,-259.84) -72.83,-236.22 -10,-236.22 -6.06,-232.28 189.93,-232.28 205.68,-248.03 252.48,-248.03 ; v1(-96.46,-165.35) -72.83,-141.73 -10,-141.73 -6.06,-137.8 189.93,-137.8 205.68,-153.54 980.61,-153.54 1056.11,-229.05 1462,-229.05 ; v1(-96.46,-70.87) -72.83,-47.24 -10,-47.24 -6.06,-43.31 189.93,-43.31 205.68,-59.06 1027.71,-59.06 1115.74,-147.09 1462,-147.09 ; v1(-61.02,-732.28) 16.23,-732.28 28.04,-720.47 174.04,-720.47 197.66,-744.09 252.48,-744.09 ; v1(-61.02,-637.8) 16.23,-637.8 28.04,-625.98 174.04,-625.98 197.66,-649.61 252.48,-649.61 ; v1(-61.02,-543.31) 16.23,-543.31 28.04,-531.5 174.04,-531.5 197.66,-555.12 831.69,-555.12 853.95,-577.38 1462,-577.38 ; v1(-61.02,-448.82) 16.23,-448.82 28.04,-437.01 174.04,-437.01 197.66,-460.63 252.48,-460.63 ; v1(-61.02,-354.33) 16.23,-354.33 28.04,-342.52 174.04,-342.52 197.66,-366.14 252.48,-366.14 ; v1(-61.02,-259.84) 16.23,-259.84 28.04,-248.03 174.04,-248.03 197.66,-271.65 252.48,-271.65 ; v1(-61.02,-165.35) 16.23,-165.35 28.04,-153.54 174.04,-153.54 197.66,-177.17 252.48,-177.17 ; v1(-61.02,-70.87) 16.23,-70.87 28.04,-59.06 174.04,-59.06 197.66,-82.68 252.48,-82.68 ; v1(9.86,-1625.7) 35.4,-1651.23 374.8,-1651.23 455.44,-1731.87 1276.54,-1731.87 1427.02,-1581.39 1462,-1581.39 ; 222.44,-767.72 685.98,-767.72 724.9,-767.72 ; 222.44,-744.09 685.98,-744.09 741.88,-744.09 ; 222.44,-720.47 685.98,-720.47 752.09,-720.47 ; 222.44,-696.85 685.98,-696.85 760.66,-696.85 ; 222.44,-673.23 685.98,-673.23 766.86,-673.23 ; 222.44,-649.61 777.32,-649.61 789.13,-661.42 908.43,-661.42 910.5,-659.34 1254.06,-659.34 1275.57,-680.85 1462.35,-680.85 ; 222.44,-625.98 790.66,-625.98 803.52,-638.85 1285.11,-638.85 1299.36,-653.09 1462.35,-653.09 ; 222.44,-602.36 808.16,-602.36 824.16,-618.36 1315.78,-618.36 1322.76,-625.34 1462.35,-625.34 ; 222.44,-578.74 819.15,-578.74 837.99,-597.58 1462.35,-597.58 ; 222.44,-531.5 841.68,-531.5 867.07,-556.89 1462,-556.89 ; 222.44,-507.87 852.66,-507.87 881.19,-536.4 1462,-536.4 ; 222.44,-484.25 861.41,-484.25 893.07,-515.91 1462,-515.91 ; 222.44,-460.63 867.14,-460.63 901.93,-495.42 1462,-495.42 ; 222.44,-413.39 887.12,-413.39 928.17,-454.44 1462,-454.44 ; 222.44,-389.76 894.19,-389.76 938.38,-433.95 1462,-433.95 ; 222.44,-366.14 902.34,-366.14 949.66,-413.46 1462,-413.46 ; 222.44,-318.9 915.47,-318.9 969.05,-372.48 1462,-372.48 ; 222.44,-271.65 933.62,-271.65 993.46,-331.5 1462,-331.5 ; 222.44,-248.03 942.53,-248.03 1005.5,-311.01 1462,-311.01 ; 222.44,-224.41 949.38,-224.41 1015.49,-290.52 1462,-290.52 ; 222.44,-200.79 958.31,-200.79 1027.55,-270.03 1462,-270.03 ; 222.44,-177.17 966.83,-177.17 1039.2,-249.54 1462,-249.54 ; 222.44,-129.92 988.24,-129.92 1066.88,-208.56 1280,-208.56 ; 222.44,-106.3 999.23,-106.3 1081,-188.07 1462,-188.07 ; 222.44,-82.68 1015.8,-82.68 1100.7,-167.58 1230,-167.58 ; 222.44,-35.43 1038.89,-35.43 1130.05,-126.6 1462,-126.6 ; v1(518.66,-1688.98) 589.53,-1618.11 700.47,-1618.11 712.28,-1629.92 938.47,-1629.92 ; v1(518.66,-1594.49) 589.53,-1523.62 700.47,-1523.62 712.28,-1535.43 938.47,-1535.43 ; v1(518.66,-1500) 589.53,-1429.13 700.47,-1429.13 712.28,-1440.94 938.47,-1440.94 ; v1(518.66,-1405.51) 589.53,-1334.65 700.47,-1334.65 712.28,-1346.46 938.47,-1346.46 ; v1(518.66,-1311.02) 589.53,-1240.16 700.47,-1240.16 712.28,-1251.97 938.47,-1251.97 ; v1(518.66,-1216.54) 589.53,-1145.67 700.47,-1145.67 712.28,-1157.48 938.47,-1157.48 ; v1(518.66,-1122.05) 589.53,-1051.18 700.47,-1051.18 712.28,-1062.99 938.47,-1062.99 ; v1(518.66,-1027.56) 589.53,-956.69 700.47,-956.69 712.28,-968.5 938.47,-968.5 ; v1(549.92,89.53) 575.45,64 1118.5,64 1268.11,-85.62 1462,-85.62 ; v1(554.09,-1688.98) 601.34,-1641.73 675.98,-1641.73 679.92,-1645.67 897.82,-1645.67 905.69,-1653.54 1255.21,-1653.54 ; v1(554.09,-1594.49) 601.34,-1547.24 675.98,-1547.24 679.92,-1551.18 897.82,-1551.18 905.34,-1558.71 ; v1(554.09,-1500) 601.34,-1452.76 675.98,-1452.76 679.92,-1456.69 897.82,-1456.69 905.34,-1464.22 938.47,-1464.22 ; v1(554.09,-1405.51) 601.34,-1358.27 675.98,-1358.27 679.92,-1362.2 897.82,-1362.2 905.34,-1369.73 938.47,-1369.73 ; v1(554.09,-1311.02) 601.34,-1263.78 675.98,-1263.78 679.92,-1267.72 897.82,-1267.72 905.34,-1275.24 938.47,-1275.24 ; v1(554.09,-1216.54) 601.34,-1169.29 675.98,-1169.29 679.92,-1173.23 897.82,-1173.23 905.34,-1180.75 938.47,-1180.75 ; v1(554.09,-1122.05) 601.34,-1074.8 675.98,-1074.8 679.92,-1078.74 897.82,-1078.74 905.34,-1086.26 938.47,-1086.26 ; v1(554.09,-1027.56) 601.34,-980.31 675.98,-980.31 679.92,-984.25 897.82,-984.25 905.34,-991.78 938.47,-991.78 ; v1(589.53,-1688.98) 613.15,-1665.35 675.98,-1665.35 679.92,-1661.42 875.92,-1661.42 891.66,-1677.17 938.47,-1677.17 ; v1(589.53,-1594.49) 613.15,-1570.87 675.98,-1570.87 679.92,-1566.93 875.92,-1566.93 891.66,-1582.68 938.47,-1582.68 ; v1(589.53,-1500) 613.15,-1476.38 675.98,-1476.38 679.92,-1472.44 875.92,-1472.44 891.66,-1488.19 938.47,-1488.19 ; v1(589.53,-1405.51) 613.15,-1381.89 675.98,-1381.89 679.92,-1377.95 875.92,-1377.95 891.66,-1393.7 938.47,-1393.7 ; v1(589.53,-1311.02) 613.15,-1287.4 675.98,-1287.4 679.92,-1283.46 875.92,-1283.46 891.66,-1299.21 1108.63,-1299.21 1195.3,-1212.57 1462,-1212.57 ; v1(589.53,-1216.54) 613.15,-1192.91 675.98,-1192.91 679.92,-1188.98 875.92,-1188.98 891.66,-1204.72 938.47,-1204.72 ; v1(589.53,-1122.05) 613.15,-1098.43 675.98,-1098.43 679.92,-1094.49 875.92,-1094.49 891.66,-1110.24 938.47,-1110.24 ; v1(589.53,-1027.56) 613.15,-1003.94 675.98,-1003.94 679.92,-1000 875.92,-1000 891.66,-1015.75 938.47,-1015.75 ; v1(624.96,-1688.98) 702.21,-1688.98 714.02,-1677.17 860.02,-1677.17 883.65,-1700.79 938.47,-1700.79 ; v1(624.96,-1594.49) 702.21,-1594.49 714.02,-1582.68 860.02,-1582.68 883.65,-1606.3 938.47,-1606.3 ; v1(624.96,-1500) 702.21,-1500 714.02,-1488.19 860.02,-1488.19 883.65,-1511.81 938.47,-1511.81 ; v1(624.96,-1405.51) 702.21,-1405.51 714.02,-1393.7 860.02,-1393.7 883.65,-1417.32 938.47,-1417.32 ; v1(624.96,-1311.02) 702.21,-1311.02 714.02,-1299.21 860.02,-1299.21 883.65,-1322.83 938.47,-1322.83 ; v1(624.96,-1216.54) 702.21,-1216.54 714.02,-1204.72 860.02,-1204.72 883.65,-1228.35 1084.56,-1228.35 1161.77,-1151.1 1462,-1151.1 ; v1(624.96,-1122.05) 702.21,-1122.05 714.02,-1110.24 860.02,-1110.24 883.65,-1133.86 938.47,-1133.86 ; v1(624.96,-1027.56) 702.21,-1027.56 714.02,-1015.75 860.02,-1015.75 883.65,-1039.37 938.47,-1039.37 ; v1(624.96,-933.07) 702.21,-933.07 714.02,-921.26 860.02,-921.26 883.65,-944.88 967.37,-944.88 ; 724.84,-767.72 736.65,-779.53 1143.07,-779.53 1183.17,-819.63 1365.28,-819.63 ; 741.85,-744.09 753.66,-755.91 1167.23,-755.91 1203.2,-791.87 1365.28,-791.87 ; 751.98,-720.47 763.79,-732.28 1190.68,-732.28 1222.51,-764.12 1365.28,-764.12 ; 760.73,-696.85 772.54,-708.66 908.43,-708.66 1212.95,-708.66 1240.65,-736.36 1454.69,-736.36 ; 766.95,-673.23 778.76,-685.04 908.43,-685.04 1229.12,-685.04 1252.68,-708.61 1462.35,-708.61 ; 908.42,-1700.79 1273.37,-1700.79 ; 908.43,-1677.17 1263.37,-1677.17 ; 908.43,-1629.92 1240.69,-1629.92 ; 908.43,-1606.3 1228.23,-1606.3 ; 908.43,-1582.68 1220.27,-1582.68 1344.52,-1458.45 1462,-1458.45 ; 908.43,-1559.05 1213.55,-1559.05 ; 908.43,-1535.43 1202.52,-1535.43 ; 908.43,-1511.81 1193.34,-1511.81 ; 908.43,-1488.19 1187.84,-1488.19 ; 908.43,-1464.57 1175.58,-1464.57 ; 908.43,-1440.94 1162.09,-1440.94 ; 908.43,-1417.32 1151.88,-1417.32 ; 908.43,-1393.7 1139.62,-1393.7 1238.82,-1294.53 1462,-1294.53 ; 908.43,-1370.08 1130.85,-1370.08 ; 908.43,-1346.46 1122.08,-1346.46 ; 908.43,-1322.83 1114.53,-1322.83 ; 908.43,-1275.59 1095.75,-1275.59 ; 908.43,-1251.97 1090.67,-1251.97 ; 908.43,-1204.72 1078.04,-1204.72 ; 908.43,-1181.1 1071.32,-1181.1 ; 908.43,-1157.48 1066.65,-1157.48 ; 908.43,-1133.86 1052.75,-1133.86 1117.46,-1069.14 1462,-1069.14 ; 908.43,-1110.24 1045.41,-1110.24 1106.99,-1048.65 1462,-1048.65 ; 908.43,-1086.61 1037.45,-1086.61 ; 908.43,-1062.99 1023.55,-1062.99 ; 908.43,-1039.37 1013.96,-1039.37 ; 908.42,-1015.75 1002.78,-1015.75 ; 908.42,-992.13 992.48,-992.13 1038.42,-946.2 1462,-946.2 ; 908.42,-968.5 981.88,-968.5 ; 967.64,-944.88 1007.3,-905.22 1462,-905.22 ; 981.37,-968.5 1024.16,-925.71 1462,-925.71 ; 1003.26,-1015.75 1052.32,-966.69 1462,-966.69 ; 1014.02,-1039.37 1066.21,-987.18 1462,-987.18 ; 1023.68,-1062.99 1079,-1007.67 1462,-1007.67 ; 1037.28,-1086.61 1095.73,-1028.16 1462,-1028.16 ; 1066.87,-1157.48 1134.72,-1089.63 1462,-1089.63 ; 1071.77,-1181.1 1142.75,-1110.12 1462,-1110.12 ; 1078.15,-1204.72 1152.26,-1130.61 1462,-1130.61 ; 1090.9,-1251.97 1171.28,-1171.59 1462,-1171.59 ; 1095.9,-1275.59 1179.41,-1192.08 1462,-1192.08 ; 1114.52,-1322.83 1204.29,-1233.06 1462,-1233.06 ; 1122.31,-1346.46 1215.21,-1253.55 1462,-1253.55 ; 1130.79,-1370.08 1226.83,-1274.04 1462,-1274.04 ; 1152.03,-1417.32 1254.33,-1315.02 1462,-1315.02 ; 1162.41,-1440.94 1267.84,-1335.51 1462,-1335.51 ; 1175.78,-1464.57 1284.35,-1356 1462,-1356 ; 1188.16,-1488.19 1299.86,-1376.49 1462,-1376.49 ; 1193.54,-1511.81 1308.37,-1396.98 1462,-1396.98 ; 1202.6,-1535.43 1320.56,-1417.47 1462,-1417.47 ; 1213.57,-1559.05 1334.66,-1437.96 1462,-1437.96 ; 1228.37,-1606.3 1355.72,-1478.94 1462,-1478.94 ; 1241.26,-1629.92 1371.75,-1499.43 1462,-1499.43 ; 1255.06,-1653.54 1388.67,-1519.92 1462,-1519.92 ; 1263.37,-1677.17 1400.12,-1540.41 1462,-1540.41 ; 1273.29,-1700.79 1413.17,-1560.9 1462,-1560.9 ; 1630,-1674.26 1719.4,-1674.26 ; 1630,-1649.85 1660.35,-1649.85 ; 1630,-1625.44 1719.4,-1625.44 ; 1630,-1601.03 1660.35,-1601.03 ; 1630,-1576.62 1719.4,-1576.62 ; 1630,-1552.21 1660.35,-1552.21 ; 1630,-1527.8 1719.4,-1527.8 ; 1630,-1503.39 1660.35,-1503.39 ; 1630,-1478.98 1719.4,-1478.98 ; 1630,-1454.57 1660.35,-1454.57 ; 1630,-1430.16 1719.4,-1430.16 ; 1630,-1405.75 1660.35,-1405.75 ; 1630,-1381.34 1719.4,-1381.34 ; 1630,-1356.93 1660.35,-1356.93 ; 1630,-1332.52 1719.4,-1332.52 ; 1630,-1308.11 1660.35,-1308.11 ; 1630,-1283.7 1719.4,-1283.7 ; 1630,-1259.3 1660.35,-1259.3 ; 1630,-1234.89 1719.4,-1234.89 ; 1630,-1210.48 1660.35,-1210.48 ; 1630,-1186.07 1719.4,-1186.07 ; 1630,-1161.66 1660.35,-1161.66 ; 1630,-1137.25 1719.4,-1137.25 ; 1630,-1112.84 1660.35,-1112.84 ; 1630,-1088.43 1719.4,-1088.43 ; 1630,-1064.02 1660.35,-1064.02 ; 1630,-1039.61 1719.4,-1039.61 ; 1630,-1015.2 1660.35,-1015.2 ; 1630,-990.79 1719.4,-990.79 ; 1630,-966.38 1660.35,-966.38 ; 1630,-941.97 1719.4,-941.97 ; 1630,-917.56 1660.35,-917.56 ; 1630,-893.15 1719.4,-893.15 ; 1630,-868.74 1660.35,-868.74 ; 1630,-844.33 1719.4,-844.33 ; 1630,-819.93 1660.35,-819.93 ; 1630,-795.52 1719.4,-795.52 ; 1630,-771.11 1660.35,-771.11 ; 1630,-746.7 1719.4,-746.7 ; 1630,-722.29 1660.35,-722.29 ; 1630,-697.88 1719.4,-697.88 ; 1630,-673.47 1660.35,-673.47 ; 1630,-649.06 1719.4,-649.06 ; 1630,-624.65 1660.35,-624.65 ; 1630,-600.24 1719.4,-600.24 ; 1630,-575.83 1660.35,-575.83 ; 1630,-551.42 1719.4,-551.42 ; 1630,-527.01 1660.35,-527.01 ; 1630,-502.6 1719.4,-502.6 ; 1630,-478.19 1660.35,-478.19 ; 1630,-453.78 1719.4,-453.78 ; 1630,-429.37 1660.35,-429.37 ; 1630,-404.96 1719.4,-404.96 ; 1630,-380.56 1660.35,-380.56 ; 1630,-356.15 1719.4,-356.15 ; 1630,-331.74 1660.35,-331.74 ; 1630,-307.33 1719.4,-307.33 ; 1630,-282.92 1660.35,-282.92 ; 1630,-258.51 1719.4,-258.51 ; 1630,-234.1 1660.35,-234.1 ; 1630,-209.69 1719.4,-209.69 ; 1630,-185.28 1660.35,-185.28 ; 1630,-160.87 1719.4,-160.87 ; 1630,-136.46 1660.35,-136.46 ; 1630,-112.05 1719.4,-112.05 ; 1630,-87.64 1660.35,-87.64 ; 1630,-63.23 1719.4,-63.23 ; 1630,-38.82 1660.35,-38.82 ; 1230,-167.58 1462,-167.58 1230,-167.58 ; 1280,-208.56 1462,-208.56 1280,-208.56
  Signal Layer 1 w6.01: 1365.28,-819.63 1382.73,-819.63 1407.43,-844.33 1630,-844.33 ; 1365.28,-791.87 1407.95,-791.87 1436,-819.93 1630,-819.93 ; 1365.28,-764.12 1427.44,-764.12 1458.84,-795.52 1630,-795.52 ; 1454.69,-736.36 1489.43,-771.11 1630,-771.11 ; 1462,-1581.39 1508.09,-1581.39 1600.95,-1674.26 1630,-1674.26 ; 1462,-1560.9 1510.52,-1560.9 1599.47,-1649.85 1630,-1649.85 ; 1462,-1540.41 1521.59,-1540.41 1606.62,-1625.44 1630,-1625.44 ; 1462,-1519.92 1525.11,-1519.92 1606.21,-1601.03 1630,-1601.03 ; 1462,-1499.43 1527.29,-1499.43 1604.47,-1576.62 1630,-1576.62 ; 1462,-1478.94 1533.91,-1478.94 1607.17,-1552.21 1630,-1552.21 ; 1462,-1458.45 1539.65,-1458.45 1608.99,-1527.8 1630,-1527.8 ; 1462,-1437.96 1541.82,-1437.96 1607.25,-1503.39 1630,-1503.39 ; 1462,-1417.47 1549.34,-1417.47 1610.85,-1478.98 1630,-1478.98 ; 1462,-1396.98 1547.52,-1396.98 1605.11,-1454.57 1630,-1454.57 ; 1462,-1376.49 1551.48,-1376.49 1605.14,-1430.16 1630,-1430.16 ; 1462,-1356 1553.65,-1356 1603.4,-1405.75 1630,-1405.75 ; 1462,-1335.51 1556.28,-1335.51 1602.11,-1381.34 1630,-1381.34 ; 1462,-1315.02 1559.35,-1315.02 1601.26,-1356.93 1630,-1356.93 ; 1462,-1294.53 1563.3,-1294.53 1601.3,-1332.52 1630,-1332.52 ; 1462,-1274.04 1564.15,-1274.04 1598.22,-1308.11 1630,-1308.11 ; 1462,-1253.55 1566.77,-1253.55 1596.93,-1283.7 1630,-1283.7 ; 1462,-1233.06 1568.07,-1233.06 1594.3,-1259.3 1630,-1259.3 ; 1462,-1212.57 1573.36,-1212.57 1595.67,-1234.89 1630,-1234.89 ; 1462,-1192.08 1578.2,-1192.08 1596.6,-1210.48 1630,-1210.48 ; 1462,-1171.59 1588.38,-1171.59 1602.86,-1186.07 1630,-1186.07 ; 1462,-1151.1 1587.01,-1151.1 1597.56,-1161.66 1630,-1161.66 ; 1462,-1130.61 1586.07,-1130.61 1592.71,-1137.25 1630,-1137.25 ; 1462,-1110.12 1584.25,-1110.12 1586.97,-1112.84 1630,-1112.84 ; 1462,-1089.63 1608.67,-1089.63 1609.87,-1088.43 1630,-1088.43 ; 1462,-1069.14 1620.27,-1069.14 1625.39,-1064.02 1630,-1064.02 ; 1462,-1048.65 1600.76,-1048.65 1609.8,-1039.61 1630,-1039.61 ; 1462,-1028.16 1593.69,-1028.16 1606.65,-1015.2 1630,-1015.2 ; 1462,-1007.67 1566.62,-1007.67 1583.5,-990.79 1630,-990.79 ; 1462,-987.18 1560.44,-987.18 1581.24,-966.38 1630,-966.38 ; 1462,-966.69 1556.03,-966.69 1580.75,-941.97 1630,-941.97 ; 1462,-946.2 1545.85,-946.2 1574.49,-917.56 1630,-917.56 ; 1462,-925.71 1524.12,-925.71 1556.67,-893.15 1630,-893.15 ; 1462,-905.22 1508.6,-905.22 1545.08,-868.74 1630,-868.74 ; 1462,-577.38 1485.53,-577.38 1532.8,-624.65 1630,-624.65 ; 1462,-556.89 1495.82,-556.89 1539.17,-600.24 1630,-600.24 ; 1462,-536.4 1509.69,-536.4 1549.12,-575.83 1630,-575.83 ; 1462,-515.91 1517.84,-515.91 1553.35,-551.42 1630,-551.42 ; 1462,-495.42 1526.7,-495.42 1558.29,-527.01 1630,-527.01 ; 1462,-474.93 1539.85,-474.93 1567.53,-502.6 1630,-502.6 ; 1462,-454.44 1547.28,-454.44 1571.04,-478.19 1630,-478.19 ; 1462,-433.95 1557.58,-433.95 1577.41,-453.78 1630,-453.78 ; 1462,-413.46 1570.02,-413.46 1585.93,-429.37 1630,-429.37 ; 1462,-392.97 1581.74,-392.97 1593.74,-404.96 1630,-404.96 ; 1462,-372.48 1588.45,-372.48 1596.53,-380.56 1630,-380.56 ; 1462,-351.99 1611.63,-351.99 1615.79,-356.15 1630,-356.15 ; 1462,-331.5 1629.76,-331.5 1630,-331.74 ; 1462,-311.01 1588.71,-311.01 1592.39,-307.33 1630,-307.33 ; 1462,-290.52 1582,-290.52 1589.6,-282.92 1630,-282.92 ; 1462,-270.03 1573.85,-270.03 1585.37,-258.51 1630,-258.51 ; 1462,-249.54 1570.94,-249.54 1586.38,-234.1 1630,-234.1 ; 1462,-229.05 1561.39,-229.05 1580.75,-209.69 1630,-209.69 ; 1462,-208.56 1554.5,-208.56 1577.78,-185.28 1630,-185.28 ; 1462,-188.07 1550.58,-188.07 1577.78,-160.87 1630,-160.87 ; 1462,-167.58 1543.15,-167.58 1574.27,-136.46 1630,-136.46 ; 1462,-147.09 1538.59,-147.09 1573.62,-112.05 1630,-112.05 ; 1462,-126.6 1530.44,-126.6 1569.4,-87.64 1630,-87.64 ; 1462,-106.11 1523.73,-106.11 1566.6,-63.23 1630,-63.23 ; 1462,-85.62 1517.02,-85.62 1563.81,-38.82 1630,-38.82 ; 1462.35,-708.61 1462.84,-708.61 1500.93,-746.7 1630,-746.7 ; 1462.35,-680.85 1463.72,-680.85 1505.16,-722.29 1630,-722.29 ; 1462.35,-653.09 1466.75,-653.09 1511.53,-697.88 1630,-697.88 ; 1462.35,-625.34 1469.77,-625.34 1517.9,-673.47 1630,-673.47 ; 1462.35,-597.58 1474.23,-597.58 1525.71,-649.06 1630,-649.06
  Signal Layer 1 w12: 1660,-1675.33 5632.04,-1675.33 ; 1660,-1650.93 5632.04,-1650.93 ; 1660,-1626.54 5632.04,-1626.54 ; 1660,-1602.14 5632.04,-1602.14 ; 1660,-1577.74 5632.04,-1577.74 ; 1660,-1553.34 5632.04,-1553.34 ; 1660,-1528.95 5632.04,-1528.95 ; 1660,-1504.55 5632.04,-1504.55 ; 1660,-1480.15 5632.04,-1480.15 ; 1660,-1455.75 5632.04,-1455.75 ; 1660,-1431.35 5632.04,-1431.35 ; 1660,-1406.96 5632.04,-1406.96 ; 1660,-1382.56 5632.04,-1382.56 ; 1660,-1358.16 5632.04,-1358.16 ; 1660,-1333.76 5632.04,-1333.76 ; 1660,-1309.37 5632.04,-1309.37 ; 1660,-1284.97 5632.04,-1284.97 ; 1660,-1260.57 5632.04,-1260.57 ; 1660,-1236.17 5632.04,-1236.17 ; 1660,-1211.78 5632.04,-1211.78 ; 1660,-1187.38 5632.04,-1187.38 ; 1660,-1162.98 5632.04,-1162.98 ; 1660,-1138.58 5632.04,-1138.58 ; 1660,-1114.19 5632.04,-1114.19 ; 1660,-1089.79 5632.04,-1089.79 ; 1660,-1065.39 5632.04,-1065.39 ; 1660,-1040.99 5632.04,-1040.99 ; 1660,-1016.6 5632.04,-1016.6 ; 1660,-992.2 5632.04,-992.2 ; 1660,-967.8 5632.04,-967.8 ; 1660,-943.4 5632.04,-943.4 ; 1660,-919.01 5632.04,-919.01 ; 1660,-894.61 5632.04,-894.61 ; 1660,-870.21 5632.04,-870.21 ; 1660,-845.81 5632.04,-845.81 ; 1660,-821.41 5632.04,-821.41 ; 1660,-797.02 5632.04,-797.02 ; 1660,-772.62 5632.04,-772.62 ; 1660,-748.22 5632.04,-748.22 ; 1660,-723.82 5632.04,-723.82 ; 1660,-699.43 5632.04,-699.43 ; 1660,-675.03 5632.04,-675.03 ; 1660,-650.63 5632.04,-650.63 ; 1660,-626.23 5632.04,-626.23 ; 1660,-601.84 5632.04,-601.84 ; 1660,-577.44 5632.04,-577.44 ; 1660,-553.04 5632.04,-553.04 ; 1660,-528.64 5632.04,-528.64 ; 1660,-504.25 5632.04,-504.25 ; 1660,-479.85 5632.04,-479.85 ; 1660,-455.45 5632.04,-455.45 ; 1660,-431.05 5632.04,-431.05 ; 1660,-406.66 5632.04,-406.66 ; 1660,-382.26 5632.04,-382.26 ; 1660,-357.86 5632.04,-357.86 ; 1660,-333.46 5632.04,-333.46 ; 1660,-309.07 5632.04,-309.07 ; 1660,-284.67 5632.04,-284.67 ; 1660,-260.27 5632.04,-260.27 ; 1660,-235.87 5632.04,-235.87 ; 1660,-211.47 5632.04,-211.47 ; 1660,-187.08 5632.04,-187.08 ; 1660,-162.68 5632.04,-162.68 ; 1660,-138.28 5632.04,-138.28 ; 1660,-113.88 5632.04,-113.88 ; 1660,-89.49 5632.04,-89.49 ; 1660,-65.09 5632.04,-65.09 ; 1660,-40.69 5632.04,-40.69
  Signal Layer 1 w100: 5975.96,-1284.97 6086.46,-1395.47 pad.0@6153.25,-1395.47